# EAGLE board Amplifier (EAGLE 7.3.0)
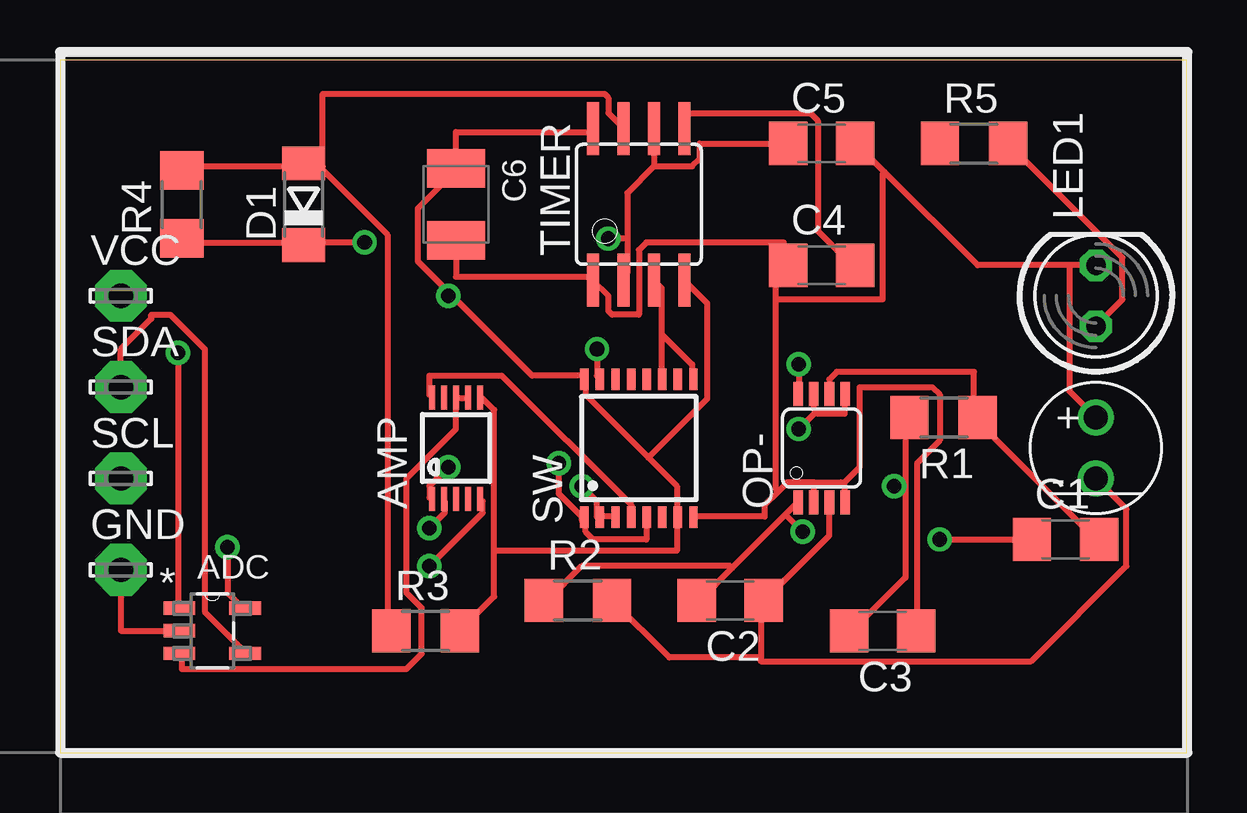
[diagram p0: board, top side]
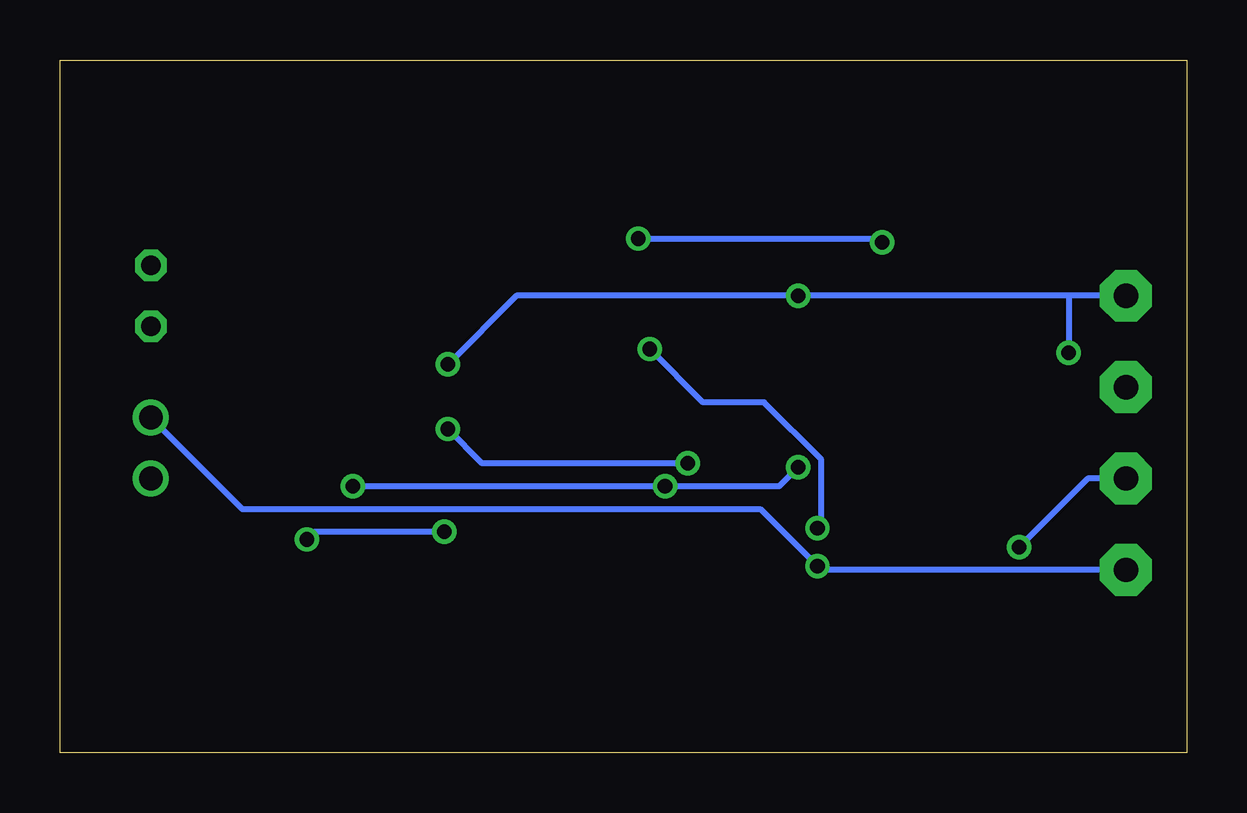
[diagram p1: board, bottom side, seen from below]

Size 46.97 x 28.88 mm. Coordinates in mm from the lower left corner, seen from the top.
Outline: 0,0 46.97,0 46.97,28.88 0,28.88 0,0
Copper layers (1*16): Top 0.035mm / dielectric 1.5mm / Bottom 0.035mm
Design rules "default": minimum track width 10mil, minimum drill 24mil, track to track 8mil, track to pad 8mil, pad to pad 8mil, via to via 8mil, smd to smd 8mil, copper to edge 40mil, drill to drill 8mil, minimum pad ring 10mil, minimum via ring 8mil, stop-mask expansion 4mil, vias tented up to drill 0mil, thermal gap 10mil

## Footprints (pad centres in the part's own frame; a part is rotated, then mirrored left to right if it is on the bottom)
SOT95P270X145-5N = smd 1.321 x 0.559: 1 -1.372,0.94; 2 -1.372,0; 3 -1.372,-0.94; 4 1.372,-0.94; 5 1.372,0.94
MSOP10 = smd 0.25 x 1: 1 -1,-2.113; 2 -0.5,-2.113; 3 0,-2.113; 4 0.5,-2.113; 5 1,-2.113; 6 1,2.113; 7 0.5,2.113; 8 0,2.113; 9 -0.5,2.113; 10 -1,2.113
C1206 = smd 1.6 x 1.8: 1 -1.4,0; 2 1.4,0
SMC_B = smd 1.6 x 2.4: + -1.5,0; - 1.5,0
SOD80C = smd 1.4 x 1.8: A 1.7,0; C -1.7,0
LSP10 = drill 1.016 pad 2.159 octagon: MP 0,0
LED5MM = drill 0.813 octagon: A -1.27,0; K 1.27,0
MSOP08 = smd 0.4 x 1: 1 -0.976,-2.263; 2 -0.326,-2.263; 3 0.324,-2.263; 4 0.974,-2.263; 5 0.974,2.262; 6 0.324,2.262; 7 -0.326,2.262; 8 -0.976,2.262
R1206 = smd 1.6 x 1.803: 1 -1.422,0; 2 1.422,0
TSSOP16 = smd 0.9 x 0.35: 1 -2.875,2.275; 2 -2.875,1.625; 3 -2.875,0.975; 4 -2.875,0.325; 5 -2.875,-0.325; 6 -2.875,-0.975; 7 -2.875,-1.625; 8 -2.875,-2.275; 9 2.875,-2.275; 10 2.875,-1.625; 11 2.875,-0.975; 12 2.875,-0.325; 13 2.875,0.325; 14 2.875,0.975; 15 2.875,1.625; 16 2.875,2.275
SOIC8 = smd 0.5 x 2.2: 1 -1.905,-3.154; 2 -0.645,-3.154; 3 0.625,-3.154; 4 1.895,-3.154; 5 1.905,3.154; 6 0.635,3.154; 7 -0.635,3.154; 8 -1.905,3.154
TO-46 = drill 0.991: + 0,-1.27; - 0,1.27

## Placement (x,y rotation side)
ADC  MCP3021A5T-E/OT  [SOT95P270X145-5N]  6.35,5.08 0 top
AMP  AD8271  [MSOP10]  16.51,12.7 0 top
C1  0.22pF  [C1206]  41.91,8.89 0 top
C2  4.7pF  [C1206]  27.94,6.35 180 top
C3  0.22pF  [C1206]  34.29,5.08 180 top
C4  10nF  [C1206]  31.75,20.32 0 top
C5  50nF  [C1206]  31.75,25.4 0 top
C6  100nF  [SMC_B]  16.51,22.86 270 top
D1  PMLL4150  [SOD80C]  10.16,22.86 90 top
GND  LSP10  [LSP10]  2.54,7.62 0 top
LED1  [LED5MM]  43.18,19.05 90 top
OP-  AD8616  [MSOP08]  31.75,12.7 0 top
R1  10k  [R1206]  36.83,13.97 180 top
R2  1M  [R1206]  21.59,6.35 0 top
R3  3k  [R1206]  15.24,5.08 0 top
R4  5k  [R1206]  5.08,22.86 90 top
R5  220R  [R1206]  38.1,25.4 0 top
SCL  LSP10  [LSP10]  2.54,11.43 0 top
SDA  LSP10  [LSP10]  2.54,15.24 0 top
SW  ADG733BRU  [TSSOP16]  24.13,12.7 90 top
TIMER  ICM7555IBA  [SOIC8]  24.13,22.86 0 top
U$1  VBT101BH  [TO-46]  43.18,12.7 180 top
VCC  LSP10  [LSP10]  2.54,19.05 0 top

## Library data of the parts
ADC = Arduino Dev Parts; MPN: MCP3021A5T-E/OT; OC_FARNELL: 1332097; OC_NEWARK: 34M7445; PACKAGE: SOT-5; SUPPLIER: Microchip
AMP OP- U$1 = Arduino Dev Parts
C1-C6 R1-R5 = rcl
D1 = diode
GND SCL SDA VCC = solpad
LED1 = led
SW = Arduino Dev Parts; MF: ANALOG DEVICES; MPN: ADG733BRUZ; OC_FARNELL: 2102516
TIMER = Arduino Dev Parts; MF: INTERSIL; MPN: ICM7555IBAZ; OC_FARNELL: 9663754

## Nets
GND: ADC.2 AMP.5 C3.1 C4.1 C5.2 C6.- GND.MP LED1.K OP-.2 OP-.4 SW.8 TIMER.1 U$1.+
LED_CLK: SW.9 SW.11 TIMER.3
N$1: OP-.5 OP-.7 SW.1 SW.5
N$2: AMP.10 SW.4
N$3: AMP.2 SW.15
N$4: ADC.5 SCL.MP
N$5: C1.2 OP-.6 R1.1
N$6: C1.1 C2.2 OP-.1 R2.1
N$7: C2.1 OP-.3 R2.2 U$1.-
N$8: LED1.A R5.2
N$9: C5.1 D1.C R4.1 TIMER.2 TIMER.6
N$10: D1.A R3.1 R4.2 TIMER.7
N$11: ADC.4 SDA.MP
N$12: C4.2 TIMER.5
SIGNAL: ADC.3 AMP.7 AMP.8
VREF: AMP.1 C3.2 R1.2 SW.2 SW.3
VSS: ADC.1 AMP.6 C6.+ OP-.8 R3.2 SW.7 SW.16 TIMER.4 TIMER.8 VCC.MP

## Tracks (layer width: path | path; a pad name or v marks a point on that pad's centre or on a via)
GND  (via drill 0.61)
  Top 0.254: C6.- 16.51,19.84 22.23,19.84 TIMER.1 22.23,19.69 22.86,19.05 22.86,18.41 23.02,18.26 24.13,18.26 24.13,20.95 24.45,21.27 30.16,21.27 30.16,20.32 C4.1 30.32,20.32 29.84,19.84 29.84,18.89 | 29.92,10.87 30.32,11.27 31.43,11.27 | 29.92,10.87 29.37,10.32 29.37,9.84 26.51,9.84 SW.8 | 31.43,11.27 31.43,10.48 OP-.2 | 32.62,11.19 32.54,11.27 31.43,11.27 | 32.62,11.19 32.7,11.11 32.7,10.48 OP-.4 | 32.62,11.19 33.34,11.91 33.34,15.24 36.35,15.24 36.67,14.92 36.67,13.02 35.72,12.06 35.72,5.08 C3.1 | 29.84,18.89 29.84,10.95 29.92,10.87 | v15.4,7.78 17.62,10 17.62,10.48 AMP.5 | ADC.2 2.54,5.08 GND.MP | 34.37,24.21 38.26,20.32 42.07,20.32 | 34.37,24.21 33.18,25.4 C5.2 | LED1.K 42.07,20.32 | U$1.+ 42.07,15.08 42.07,20.32 | 29.84,18.89 34.29,18.89 34.29,24.13 34.37,24.21
  Bottom 0.254: GND.MP 15.24,7.62 v15.4,7.78 17.78,10.16 39.37,10.16 U$1.+
LED_CLK
  Top 0.254: 25.08,17.46 25.08,19.37 24.77,19.69 TIMER.3 | 25.08,17.46 25.08,15.72 SW.11 | 25.08,17.46 26.35,16.19 26.35,15.72 SW.9
N$1  (via drill 0.61)
  Top 0.254: 31.51,14.21 31.59,14.13 32.7,14.13 32.7,14.92 OP-.5 | 31.51,14.21 31.43,14.29 31.43,14.92 OP-.7 | SW.5 24.45,9.68 24.45,8.89 22.23,8.89 21.91,9.21 21.91,9.52 21.75,9.68 SW.1 21.75,9.84 20.8,10.8 v20.8,12.06 | v30.8,13.49 31.51,14.21
  Bottom 0.254: v30.8,13.49 29.37,12.06 v20.8,12.06
N$2
  Top 0.254: SW.4 23.81,9.84 23.81,10.32 18.41,15.72 15.4,15.72 15.4,14.92 AMP.10
N$3  (via drill 0.61)
  Top 0.254: v22.38,16.83 22.38,15.72 SW.15 | v15.4,9.37 16.03,10 16.03,10.48 AMP.2
  Bottom 0.254: v22.38,16.83 20.16,14.61 17.62,14.61 15.24,12.22 15.24,9.37 v15.4,9.37
N$4  (via drill 0.61)
  Top 0.254: v6.99,8.57 6.99,6.67 7.62,6.03 ADC.5
  Bottom 0.254: v6.99,8.57 4.13,11.43 SCL.MP
N$5
  Top 0.254: OP-.6 32.07,15.08 32.07,15.56 32.38,15.88 38.1,15.88 38.1,13.97 R1.1 38.26,13.81 43.18,8.89 C1.2
N$6  (via drill 0.61)
  Top 0.254: 28.02,7.7 26.67,6.35 C2.2 | 28.02,7.7 30.24,9.92 | 30.24,9.92 30.64,10.32 OP-.1 | v36.67,8.89 C1.1 | 30.24,9.92 v30.96,9.21 | R2.1 20.32,6.35 21.75,7.78 27.94,7.78 28.02,7.7
  Bottom 0.254: v36.67,8.89 36.35,9.21 v30.96,9.21
N$7
  Top 0.254: OP-.3 32.07,10.32 32.07,9.05 29.37,6.35 C2.1 29.21,6.35 29.21,3.97 | 29.21,3.97 25.4,3.97 R2.2 | U$1.- 44.45,10.16 44.45,7.78 40.48,3.81 29.21,3.81 29.21,3.97
N$8
  Top 0.254: LED1.A 44.29,18.89 44.29,20.64 R5.2
N$9  (via drill 0.61)
  Top 0.254: 10.16,21.27 5.08,21.27 R4.1 | C5.1 26.67,25.4 26.67,24.77 26.35,24.45 24.77,24.45 | TIMER.6 24.77,24.45 | 23.65,21.43 23.65,23.34 24.77,24.45 | 23.65,21.43 23.65,20 23.49,19.84 TIMER.2 | v12.7,21.27 10.16,21.27 | 23.65,21.43 v22.86,21.43 | 10.16,21.27 D1.C
  Bottom 0.254: v12.7,21.27 12.86,21.43 v22.86,21.43
N$10
  Top 0.254: 10.16,24.45 5.08,24.45 R4.2 | 10.16,24.45 10.79,24.45 13.65,21.59 13.65,5.24 R3.1 | 10.16,24.45 D1.A 10.95,24.45 10.95,27.46 22.7,27.46 22.86,27.3 22.86,26.67 23.49,26.03 TIMER.7
N$11
  Top 0.254: SDA.MP 2.54,16.83 3.81,18.1 3.81,18.26 4.6,18.26 6.03,16.83 6.03,5.87 7.62,4.29 ADC.4
N$12
  Top 0.254: TIMER.5 26.03,26.67 31.27,26.67 31.59,26.35 31.59,21.75 33.02,20.32 C4.2
SIGNAL
  Top 0.254: 16.51,14.76 16.99,14.76 AMP.7 | 16.51,14.76 16.51,13.49 14.45,11.43 14.45,6.67 15.08,6.03 15.08,4.13 14.45,3.49 5.08,3.49 5.08,4.13 ADC.3 | 16.51,14.76 AMP.8
VREF  (via drill 0.61)
  Top 0.254: SW.3 23.02,9.84 22.54,9.84 SW.2 22.38,9.84 22.38,10.48 v21.75,11.11 | v16.19,11.91 15.4,11.11 15.4,10.64 AMP.1 | 35.24,11.11 35.24,13.81 R1.2 | 35.24,11.11 35.24,7.3 33.02,5.08 C3.2 | 35.24,11.11 v34.77,11.11
  Bottom 0.254: v16.19,11.91 16.99,11.11 v21.75,11.11 v34.77,11.11
VSS  (via drill 0.61)
  Top 0.254: 18.1,8.41 18.1,6.51 R3.2 | 18.1,8.41 18.1,14.29 17.62,14.76 AMP.6 | TIMER.8 22.23,25.88 16.51,25.88 C6.+ 16.51,24.29 14.92,22.7 14.92,20.48 16.27,19.13 | 24.53,12.3 21.91,14.92 21.91,15.56 SW.16 21.75,15.72 19.68,15.72 16.27,19.13 | 24.53,12.3 25.72,11.11 25.72,9.84 SW.7 25.72,9.68 25.72,8.41 18.1,8.41 | 24.53,12.3 26.99,14.76 26.99,18.73 26.03,19.69 TIMER.4 | v30.8,16.19 30.8,15.08 OP-.8 | v4.92,16.67 4.92,6.03 ADC.1 | v16.19,19.05 16.27,19.13
  Bottom 0.254: v30.8,16.19 27.94,19.05 v16.19,19.05 4.92,19.05 | VCC.MP 4.92,19.05 | 4.92,19.05 v4.92,16.67